# EAGLE board tick-mk-4.7 (EAGLE 6.5.0)
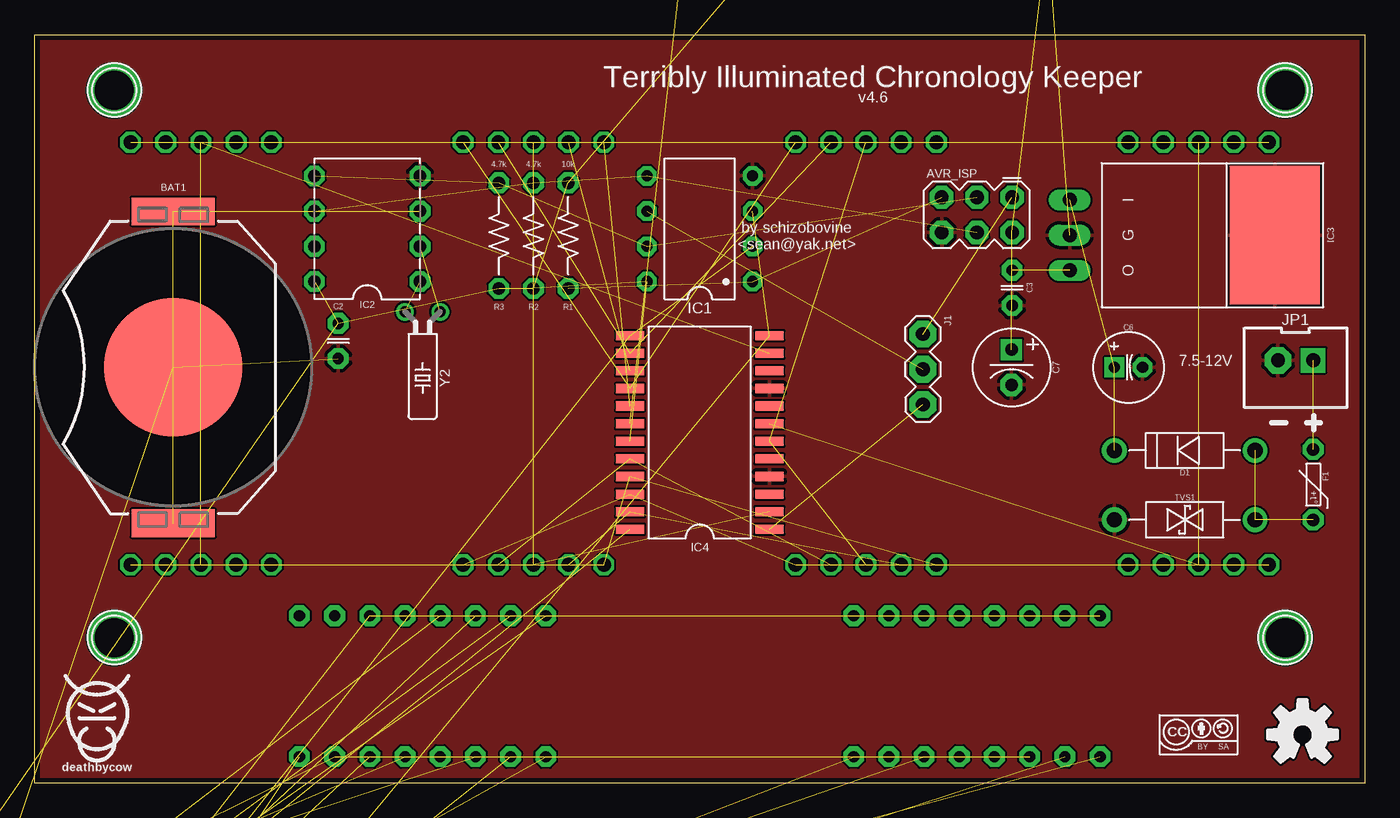
[diagram p0: board, top side]
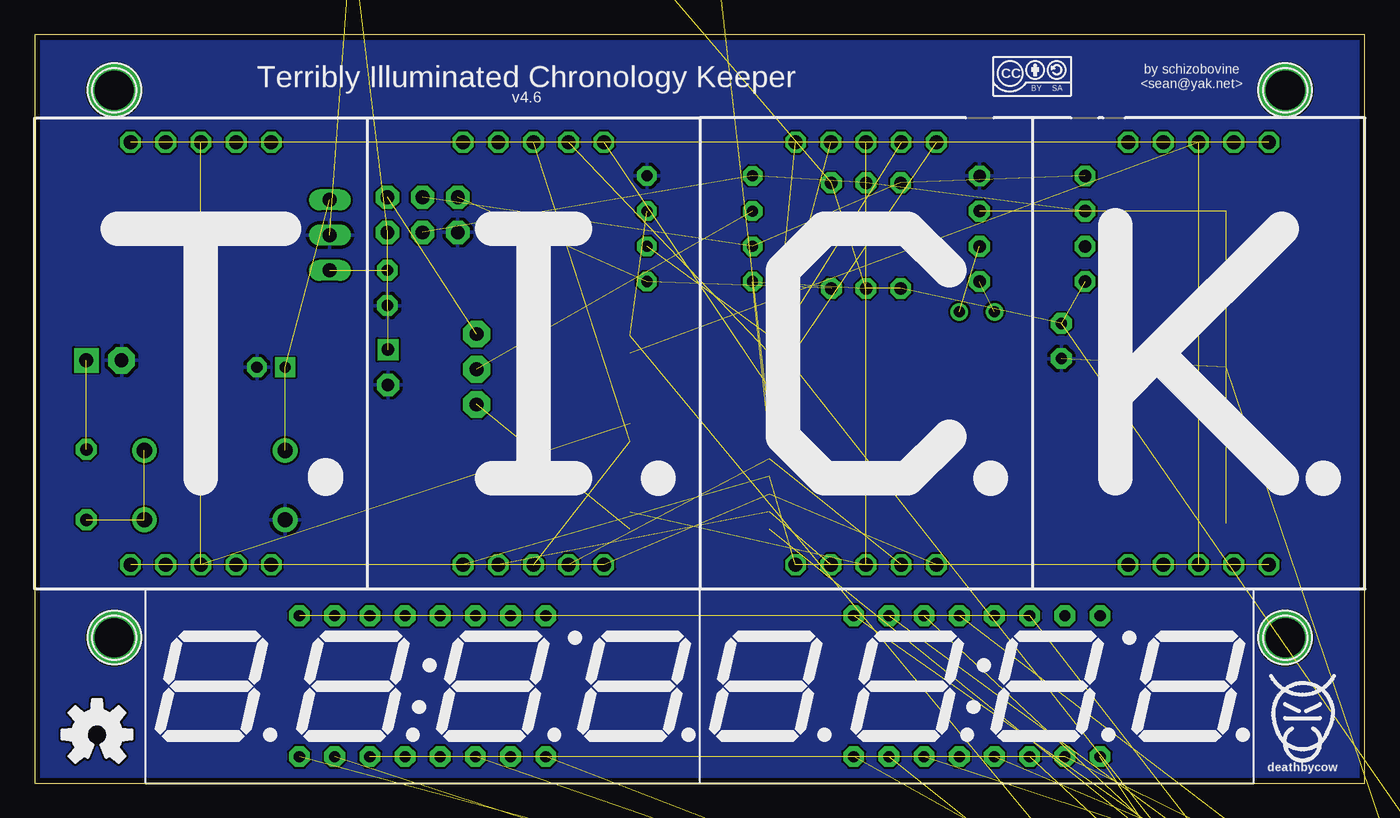
[diagram p1: board, bottom side, seen from below]

Size 96 x 54 mm. Coordinates in mm from the lower left corner, seen from the top.
Outline: 0,54 96,54 96,0 0,0 0,54
Copper layers (1*16): Top 0.0356mm / dielectric 1.5011mm / Bottom 0.0356mm
Design rules "LaenPCBOrder2": minimum track width 6mil, minimum drill 13mil, track to track 6mil, track to pad 6mil, pad to pad 6mil, via to via 6mil, smd to smd 6mil, copper to edge 15mil, drill to drill 6mil, minimum pad ring 7mil, minimum via ring 7mil, stop-mask expansion 3mil, vias tented up to drill 20mil, thermal gap 10mil

## Footprints (pad centres in the part's own frame; a part is rotated, then mirrored left to right if it is on the bottom)
2X3 = drill 1 pad 1.676 octagon: 1 -2.54,-1.27; 2 -2.54,1.27; 3 0,-1.27; 4 0,1.27; 5 2.54,-1.27; 6 2.54,1.27
BATTCON_20MM_MINE = smd 10 x 10: BOTTOM 0,0 | smd 6 x 2: TOP@1 0,11.25; TOP@2 0,-11.25
C025-024X044 = drill 0.813 pad 1.5 octagon: 1 -1.27,0; 2 1.27,0
E2-5 = drill 0.813 pad 1.422 square: + -1.016,0 | drill 0.813 pad 1.422 octagon: - 1.016,0
E2,5-6 = drill 0.9 pad 1.524 square: + -1.27,0 | drill 0.9 pad 1.6 octagon: - 1.27,0
DIODE-10.16MM = drill 1.1 pad 1.778: A -5.08,0; C 5.08,0
7SEG_1DIG_25.4MM_NOSILK = drill 1 pad 1.5 octagon: 1 -5.08,-15.24; 2 -2.54,-15.24; 3 0,-15.24; 4 2.54,-15.24; 5 5.08,-15.24; 6 5.08,15.24; 7 2.54,15.24; 8 0,15.24; 9 -2.54,15.24; 10 -5.08,15.24
7SEG_4DIG_10MM = drill 0.8 pad 1.5 octagon: 1 -8.89,-5.08; 2 -6.35,-5.08; 3 -3.81,-5.08; 4 -1.27,-5.08; 5 1.27,-5.08; 6 3.81,-5.08; 7 6.35,-5.08; 8 8.89,-5.08; 9 8.89,5.08; 10 6.35,5.08; 11 3.81,5.08; 12 1.27,5.08; 13 -1.27,5.08; 14 -3.81,5.08; 15 -6.35,5.08; 16 -8.89,5.08
PTC-PTH-5.08MM = drill 0.9 pad 1.5 octagon: P$1 -2.54,0; P$2 2.54,0
HOLE-#2 = drill 2.8 pad 3.81: P$1 0,0
DIP08 = drill 0.8 pad 1.4 octagon: 1 -3.81,-3.81; 2 -1.27,-3.81; 3 1.27,-3.81; 4 3.81,-3.81; 5 3.81,3.81; 6 1.27,3.81; 7 -1.27,3.81; 8 -3.81,3.81
DIL08 = drill 0.9 pad 1.5 octagon: 1 -3.81,-3.81; 2 -1.27,-3.81; 3 1.27,-3.81; 4 3.81,-3.81; 5 3.81,3.81; 6 1.27,3.81; 7 -1.27,3.81; 8 -3.81,3.81
TO220-IGO-THERMPAD = smd 10 x 6.5: 4 0,11 | drill 1 long: GND 0,-3.81; IN -2.54,-3.81; OUT 2.54,-3.81
SO24W = smd 0.66 x 2.032: 1 -6.985,-5.029; 2 -5.715,-5.029; 3 -4.445,-5.029; 4 -3.175,-5.029; 5 -1.905,-5.029; 6 -0.635,-5.029; 7 0.635,-5.029; 8 1.905,-5.029; 9 3.175,-5.029; 10 4.445,-5.029; 11 5.715,-5.029; 12 6.985,-5.029; 13 6.985,5.029; 14 5.715,5.029; 15 4.445,5.029; 16 3.175,5.029; 17 1.905,5.029; 18 0.635,5.029; 19 -0.635,5.029; 20 -1.905,5.029; 21 -3.175,5.029; 22 -4.445,5.029; 23 -5.715,5.029; 24 -6.985,5.029
1X03 = drill 1 pad 1.93 octagon: 1 0,0; 2 2.54,0; 3 5.08,0
JST-2-XH-VERT-PTH = drill 1 pad 1.778 square: 1 -1.27,0 | drill 1 pad 1.93 octagon: 2 1.27,0
RESISTOR-AXIAL-PTH-7.62MM = drill 0.9 pad 1.5 octagon: P$1 -3.81,0; P$2 3.81,0
DO-41-TVS-BI-10.16MM = drill 1.1 pad 1.778: P$1 -5.08,0; P$2 5.08,0
TC26H = drill 0.8 pad 1.27: 1 -1.27,0; 2 1.27,0

## Placement (x,y rotation side)
AVR_ISP  AVR_SPI_PRG_6PTH  [2X3]  68,41 180 top
BAT1  20mm coincell  [BATTCON_20MM_MINE]  10,30 180 top
C1  0.1uF  [C025-024X044]  73.23,61 270 top  (outside the outline)
C2  0.1uF  [C025-024X044]  21.91,31.9 270 top
C3  0.1uF  [C025-024X044]  70.54,35.73 270 top
C4  0.1uF  [C025-024X044]  -3,-4.5 0 top  (outside the outline)
C5  1uF  [C025-024X044]  -3,-7 0 top  (outside the outline)
C6  10uF  [E2-5]  78.94,30 0 top
C7  100uF  [E2,5-6]  70.5,30 270 top
D1  1N5819  [DIODE-10.16MM]  83,24 180 top
DIGIT1  7SEG_1DIGPTH-25.4MM-BARE  [7SEG_1DIG_25.4MM_NOSILK]  36,31 0 bottom
DIGIT2  7SEG_1DIGPTH-25.4MM-BARE  [7SEG_1DIG_25.4MM_NOSILK]  12,31 0 bottom
DIGIT3  7SEG_1DIGPTH-25.4MM-BARE  [7SEG_1DIG_25.4MM_NOSILK]  60,31 0 bottom
DIGIT4  7SEG_1DIGPTH-25.4MM-BARE  [7SEG_1DIG_25.4MM_NOSILK]  84,31 0 bottom
DISPLAY1  7SEG_4DIGIT_COLON_APOS  [7SEG_4DIG_10MM]  68,7 0 bottom
DISPLAY2  7SEG_4DIGIT_COLON_APOS  [7SEG_4DIG_10MM]  28,7 0 bottom
F1  500mA  [PTC-PTH-5.08MM]  92.27,21.54 270 top
H1  HOLE#2  [HOLE-#2]  5.75,10.5 0 top
H2  HOLE#2  [HOLE-#2]  5.75,50 0 top
H3  HOLE#2  [HOLE-#2]  90.25,10.5 0 top
H4  HOLE#2  [HOLE-#2]  90.25,50 0 top
IC1  TINY85-20-DIP  [DIP08]  48,40 90 top
IC2  DS1307  [DIL08]  24,40 90 top
IC3  L7805  [TO220-IGO-THERMPAD]  78.51,39.54 270 top
IC4  MAX7219  [SO24W]  48,25.3 90 top
IC5  MAX7219  [SO24W]  3,-14.5 0 top  (outside the outline)
J1  PROG  [1X03]  64.1,32.4 270 top
JP1  M02JST-XH-VERT  [JST-2-XH-VERT-PTH]  91,30.5 180 top
R1  10k  [RESISTOR-AXIAL-PTH-7.62MM]  38.5,39.5 90 top
R2  4.7k  [RESISTOR-AXIAL-PTH-7.62MM]  36,39.5 90 top
R3  4.7k  [RESISTOR-AXIAL-PTH-7.62MM]  33.5,39.5 90 top
R4  4.7k  [RESISTOR-AXIAL-PTH-7.62MM]  0,-22 0 top  (outside the outline)
R5  4.7k  [RESISTOR-AXIAL-PTH-7.62MM]  50.9,62.3 0 top  (outside the outline)
TVS1  5.6V  [DO-41-TVS-BI-10.16MM]  83,19 0 top
U$1  [COW_SMALL]  4.5,5.2 0 top
U$2  [CC-BY-SA-4.0-NO-URL]  24,51 0 bottom
U$3  [CC-BY-SA-4.0-NO-URL]  84,3.5 0 top
U$4  [COW_SMALL]  4.5,5.2 0 bottom
U$5  [OSHWLOGO_TOP_0.2]  91.5,3.5 0 top
U$8  [OSHWLOGO_TOP_0.2]  91.5,3.5 0 bottom
Y2  32.768kHz  [TC26H]  28,34 180 top

## Library data of the parts
AVR_ISP BAT1 C1-C7 D1 DIGIT1-DIGIT4 DISPLAY1 DISPLAY2 F1 H1-H4 IC2-IC5 J1 JP1 R1-R5 TVS1 U$1-U$5 U$8 Y2 = A_butts
IC1 = A_butts; PROD_ID: IC-09445

## Nets
A1: DISPLAY1.14 DISPLAY2.14 IC5.14
A2: DIGIT1.7 DIGIT2.7 DIGIT3.7 DIGIT4.7 IC4.14
B1: DISPLAY1.16 DISPLAY2.16 IC5.16
B2: DIGIT1.6 DIGIT2.6 DIGIT3.6 DIGIT4.6 IC4.16
C1: DISPLAY1.13 DISPLAY2.13 IC5.20
C2: DIGIT1.4 DIGIT2.4 DIGIT3.4 DIGIT4.4 IC4.20
CLK: IC1.2 IC4.13 IC5.13
D1: DISPLAY1.3 DISPLAY2.3 IC5.23
D2: DIGIT1.2 DIGIT2.2 DIGIT3.2 DIGIT4.2 IC4.23
DIG0: DISPLAY1.1 IC5.2
DIG1: DISPLAY1.2 IC5.11
DIG2: DISPLAY1.6 IC5.6
DIG3: DISPLAY1.8 IC5.7
DIG4: DISPLAY2.1 IC5.3
DIG5: DISPLAY2.2 IC5.10
DIG6: DISPLAY2.6 IC5.5
DIG7: DISPLAY2.8 IC5.8
DIG8: DIGIT1.3 DIGIT1.8 IC4.2
DIG9: DIGIT2.3 DIGIT2.8 IC4.11
DIG10: DIGIT3.3 DIGIT3.8 IC4.6
DIG11: DIGIT4.3 DIGIT4.8 IC4.7
DIG12: IC4.3
DIG13: IC4.10
DIG14: IC4.5
DIG15: IC4.8
DIN: IC4.1 J1.3
DP1: DISPLAY1.7 DISPLAY2.7 IC5.22
DP2: DIGIT1.5 DIGIT2.5 DIGIT3.5 DIGIT4.5 IC4.22
E1: DISPLAY1.5 DISPLAY2.5 IC5.21
E2: DIGIT1.1 DIGIT2.1 DIGIT3.1 DIGIT4.1 IC4.21
F1: DISPLAY1.11 DISPLAY2.11 IC5.15
F2: DIGIT1.9 DIGIT2.9 DIGIT3.9 DIGIT4.9 IC4.15
G1: DISPLAY1.15 DISPLAY2.15 IC5.17
G2: DIGIT1.10 DIGIT2.10 DIGIT3.10 DIGIT4.10 IC4.17
GND: AVR_ISP.6 BAT1.BOTTOM C1.2 C2.2 C3.2 C4.2 C5.2 C6.- C7.- IC1.4 IC2.4 IC3.4 IC3.GND IC4.4 IC4.9 IC5.4 IC5.9 JP1.2 TVS1.P$1
LOAD: IC1.3 IC4.12 IC5.12
MISO: AVR_ISP.1 J1.1
MISO/DIN: IC1.6 J1.2
MOSI/SDA: AVR_ISP.4 IC1.5 IC2.6 R2.P$2
N$1: BAT1.TOP@1 BAT1.TOP@2 IC2.3
N$2: IC2.1 Y2.2
N$3: IC2.2 Y2.1
N$4: D1.A F1.P$2 TVS1.P$2
N$6: IC5.24
N$7: F1.P$1 JP1.1
N$8: C6.+ D1.C IC3.IN
N$9: IC4.24 IC5.1
N$11: IC5.18 R4.P$1
N$12: IC4.18 R5.P$1
RST: AVR_ISP.5 IC1.1 R1.P$1
SCK/SCL: AVR_ISP.3 IC1.7 IC2.5 R3.P$2
VCC: AVR_ISP.2 C1.1 C2.1 C3.1 C4.1 C5.1 C7.+ IC1.8 IC2.8 IC3.OUT IC4.19 IC5.19 R1.P$2 R2.P$1 R3.P$1 R4.P$2 R5.P$2

## Tracks (layer width: path | path; a pad name or v marks a point on that pad's centre or on a via)
A1  (2 unrouted)
A2  (4 unrouted)
B1  (2 unrouted)
B2  (4 unrouted)
C1  (2 unrouted)
C2  (4 unrouted)
CLK  (2 unrouted)
D1  (2 unrouted)
D2  (4 unrouted)
DIG0  (1 unrouted)
DIG1  (1 unrouted)
DIG2  (1 unrouted)
DIG3  (1 unrouted)
DIG4  (1 unrouted)
DIG5  (1 unrouted)
DIG6  (1 unrouted)
DIG7  (1 unrouted)
DIG8  (2 unrouted)
DIG9  (2 unrouted)
DIG10  (2 unrouted)
DIG11  (2 unrouted)
DIN  (1 unrouted)
DP1  (2 unrouted)
DP2  (4 unrouted)
E1  (2 unrouted)
E2  (4 unrouted)
F1  (2 unrouted)
F2  (4 unrouted)
G1  (2 unrouted)
G2  (4 unrouted)
GND  (6 unrouted)
  pour Bottom: 0,54 96,54 96,0 0,0
  pour Top: 0,54 96,54 96,0 0,0
LOAD  (2 unrouted)
MISO  (1 unrouted)
MISO/DIN  (1 unrouted)
MOSI/SDA  (3 unrouted)
N$1  (2 unrouted)
N$2  (1 unrouted)
N$3  (1 unrouted)
N$4  (2 unrouted)
N$5
  cutout Top: 10,20 arc-90 0,30 arc-90 10,40 arc-90 20,30 arc-90
N$7  (1 unrouted)
N$8  (2 unrouted)
N$9  (1 unrouted)
N$11  (1 unrouted)
N$12  (1 unrouted)
RST  (2 unrouted)
SCK/SCL  (3 unrouted)
VCC  (16 unrouted)

## Text on the board
tPlace: Terribly Illuminated Chronology Keeper | v4.6 | by schizobovine / <sean@yak.net> | 7.5-12V
bPlace: by schizobovine / <sean@yak.net> | Terribly Illuminated Chronology Keeper | v4.6